# Altium PCB BTL.PcbDoc
Units mm, origin at the board's own origin, x right, y up, seen from the top; angles counter-clockwise.
Board outline 106.17 x 46.48 mm, 2 copper layers (Top Layer, Bottom Layer); 36 components, 67 nets, 172 pads, 38 vias.
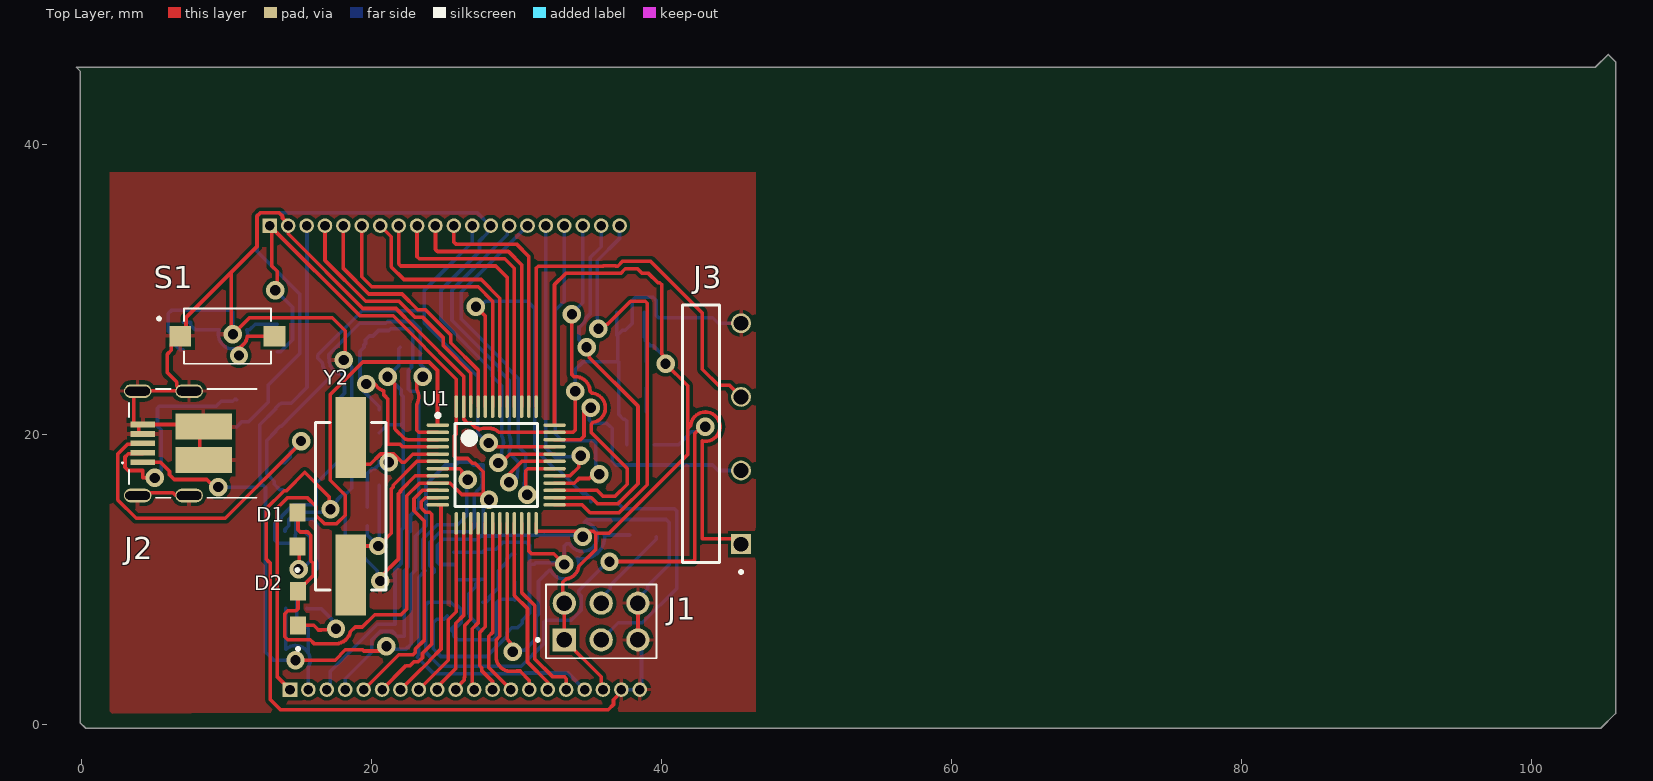
[diagram p0: Top Layer view]
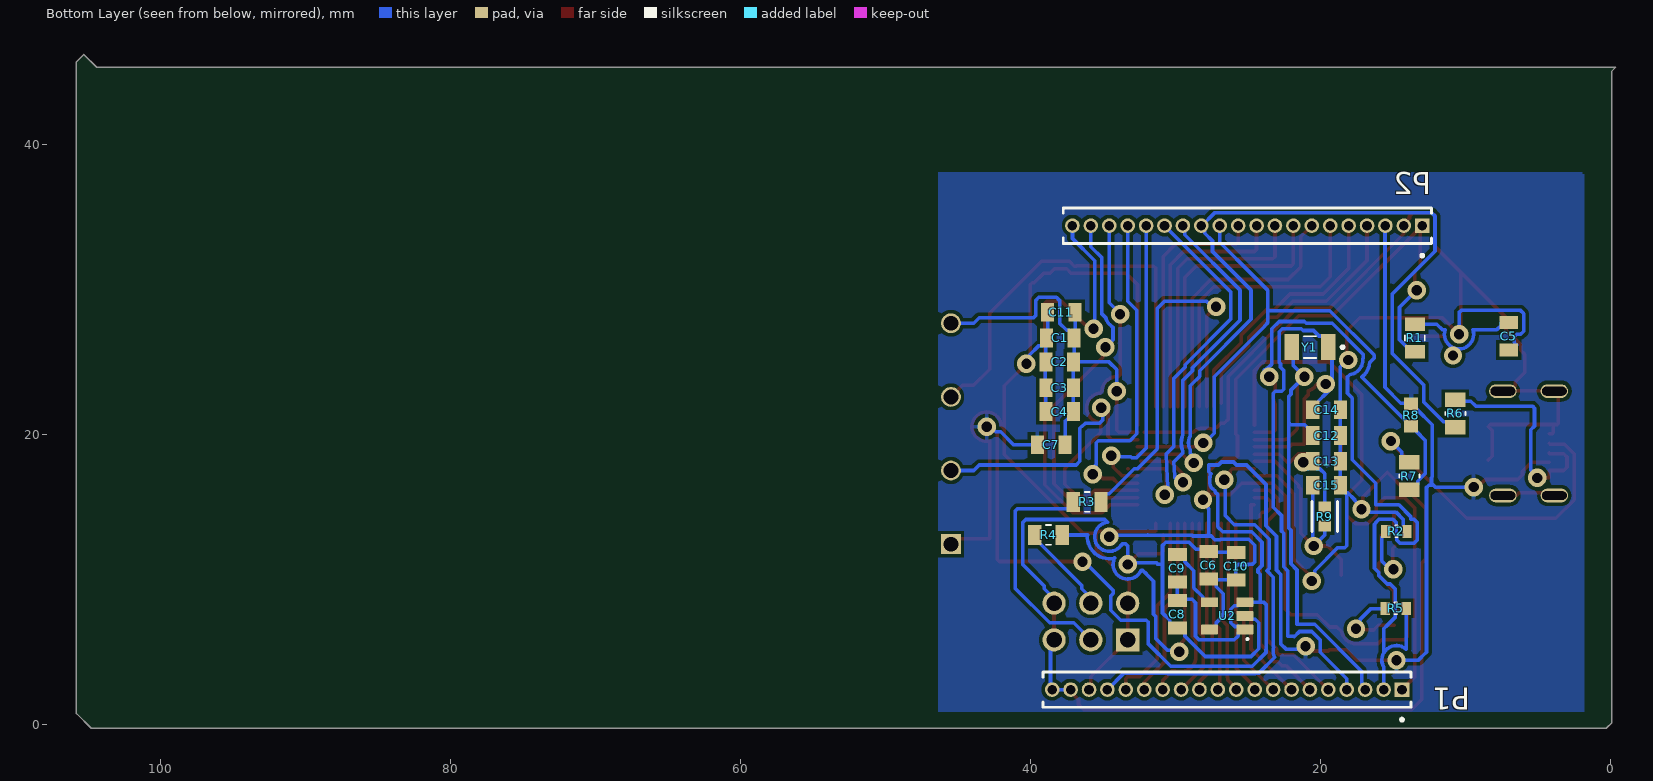
[diagram p1: Bottom Layer view, seen from below]
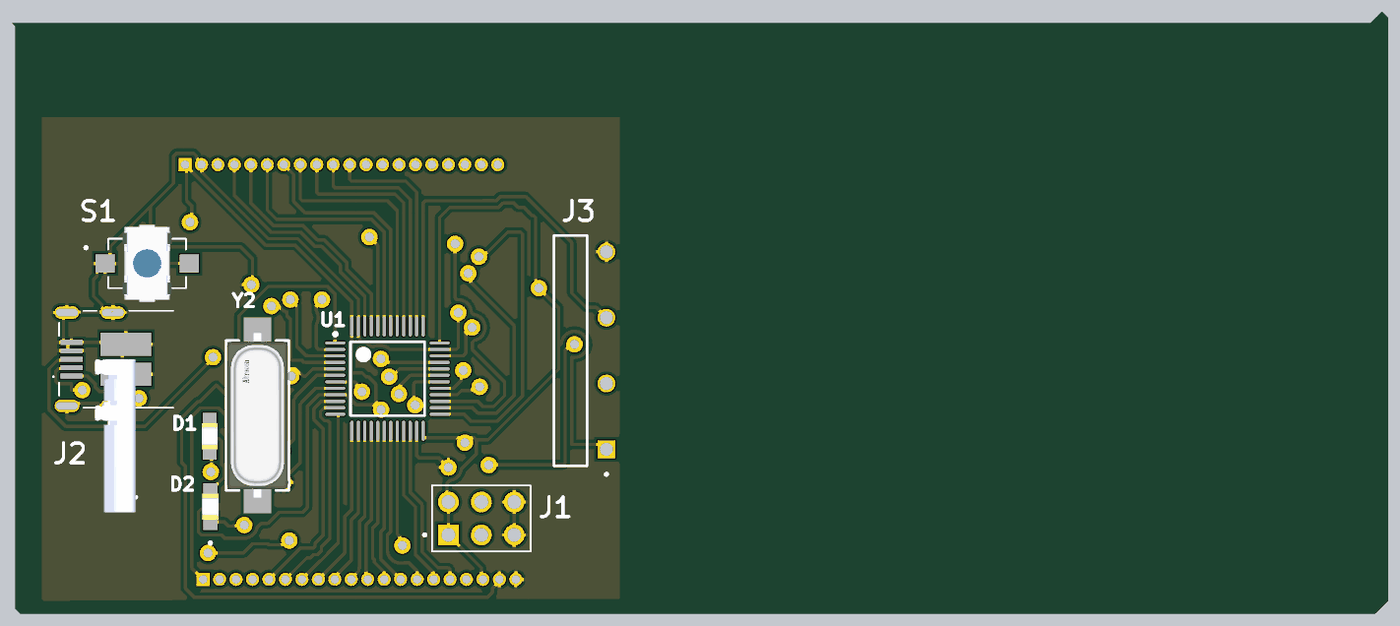
[diagram p2: 3D render of the assembled board from above, using the file's embedded part models]
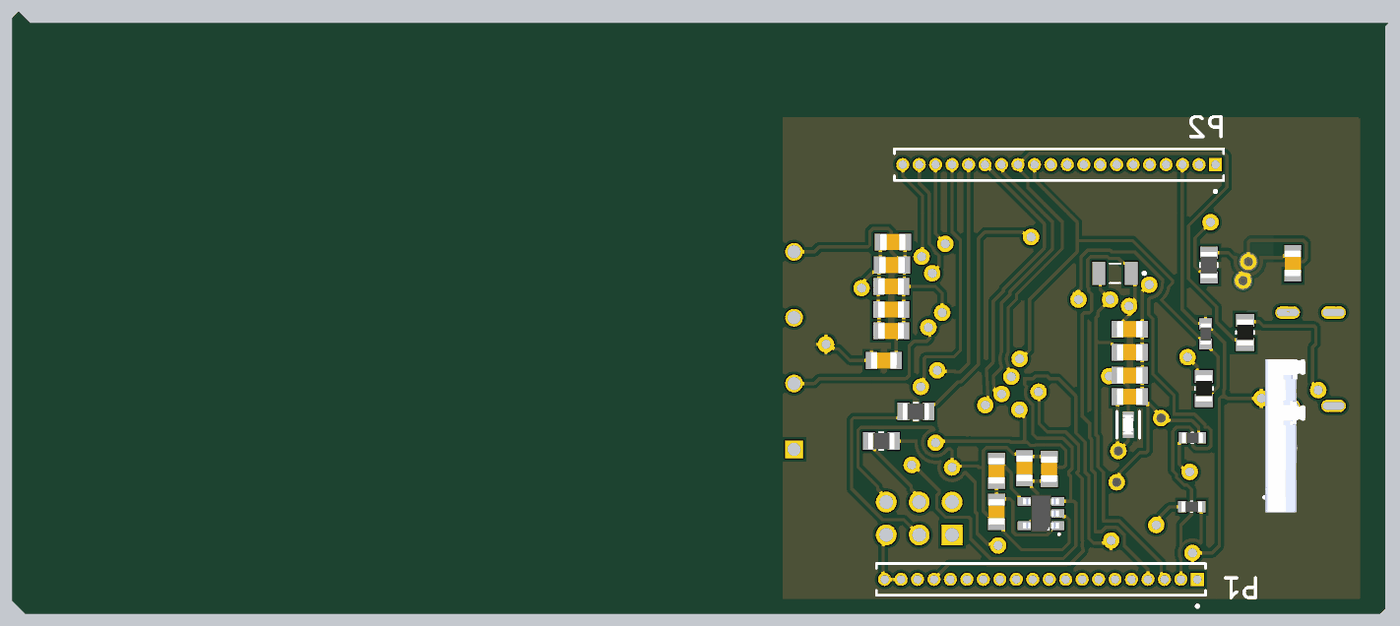
[diagram p3: 3D render of the assembled board from below, using the file's embedded part models]

## Layer stack, top to bottom
Top Solder: solder mask 0.0102, Solder Resist, Dk 3.5
Top Layer: signal copper 0.0356
Dielectric 1: dielectric 0.32, FR-4, Dk 4.8
Bottom Layer: signal copper 0.0356
Bottom Solder: solder mask 0.0102, Solder Resist, Dk 3.5

## Board outline
-0.127,45.085 -0.127,0.127 0.254,-0.254 104.775,-0.254 105.791,0.762 105.791,45.72 105.283,46.228 104.394,45.339 -0.381,45.339

## Design rules (kind name [scope] priority, off if disabled: settings)
Clearance [All] p1: gap=0.25 ignorepadtopadclearanceinfootprint=TRUE
MinimumSolderMaskSliver [All] p1: minsoldermaskwidth=0.045
PolygonConnect [All] p1: connectstyle=Relief reliefconductorwidth=0.254 reliefentries=4 polygonreliefangle="90 Angle" airgapwidth=0.254
RoutingVias [All] p1: holewidth=0.711 width=1.27 viastyle="Through Hole" minholewidth=0.711 minwidth=1.27 maxholewidth=0.711 maxwidth=1.27
SilkToSolderMaskClearance [IsPad] p1: minsilkscreentomaskgap=0 clearancetoexposedcopper=TRUE
SolderMaskExpansion [All] p1: expansion=0.102 istentingtop=FALSE
SupplyNets "Schematic Supply Nets_4" [InNet('5v')] p1: voltage=0.000
SupplyNets "Schematic Supply Nets_2" [InNet('VCC3V3')] p2: voltage=0.000
SupplyNets "Schematic Supply Nets" [InNet('GND')] p3: voltage=0.000
Width [All] p1: maxlimit=0.254 minlimit=0.25 preferedwidth=0.25
28 further rules are at their usual default settings.

## Components (designator, comment, footprint, x,y, rotation, side; value= is the part's Value field where it differs from the comment)
C1 "100nF" WCAP-CSGP_0805_L2W1.25H0.8_Reflow 37.912,26.67 r0 bottom
C2 "100nF" WCAP-CSGP_0805_L2W1.25H0.8_Reflow 37.973,25.019 r0 bottom
C3 "100nF" WCAP-CSGP_0805_L2W1.25H0.8_Reflow 37.973,23.241 r0 bottom
C4 "100nF" WCAP-CSGP_0805_L2W1.25H0.8_Reflow 37.973,21.59 r0 bottom
C5 "1μF" WCAP-CSGP_0805_L2W1.25H1.25 6.985,26.797 r90 bottom
C6 "100nF" WCAP-CSGP_0805_L2W1.25H0.8_Reflow 27.686,10.983 r270 bottom
C7 "1μF" WCAP-CSGP_0805_L2W1.25H1.25 38.542,19.304 r0 bottom
C8 "22nF" WCAP-CSGP_0805_L2W1.25H0.8_Reflow 29.845,7.62 r90 bottom
C9 "100nF" WCAP-CSGP_0805_L2W1.25H0.8_Reflow 29.845,10.795 r270 bottom
C10 "10μF" WCAP-CSGP_0805_L2W1.25H1.25 25.781,10.922 r270 bottom
C11 "22nF" WCAP-CSGP_0805_L2W1.25H0.8_Reflow 37.846,28.448 r0 bottom
C12 "22pF" WCAP-CSGP_0805_L2W1.25H0.6_Reflow 19.558,19.939 r0 bottom
C13 "22pF" WCAP-CSGP_0805_L2W1.25H0.6_Reflow 19.558,18.161 r0 bottom
C14 "22pF" WCAP-CSGP_0805_L2W1.25H0.6_Reflow 19.558,21.717 r0 bottom
C15 "22pF" WCAP-CSGP_0805_L2W1.25H0.6_Reflow 19.558,16.51 r0 bottom
D1 "AP2012MGC" LED_AP2012MGC 14.859,13.462 r90 top
D2 "AP2012MGC" LED_AP2012MGC 14.906,8.02 r90 top
J1 "3x2 header" HARWIN_M20-9980346 35.814,7.112 r0 top
J2 "UJ2-MIBH-4-SMT-TR" CUIDEVICES_UJ2-MIBH-4-SMT-TR 9.141,19.401 r90 top
J3 "SWD" SAMTEC_TSW-204-16-G-S-RA 45.466,12.446 r270 top
P1 "TMS-120-21-S-S" SAMTEC_TMS-120-21-S-S 26.416,2.413 r0 bottom
P2 "TMS-120-21-S-S" SAMTEC_TMS-120-21-S-S 25.019,34.417 r0 bottom
R1 "10K" RESC2012X60N#1 13.462,26.67 r90 bottom
R2 "ERJPA3F5100V" RES_ERJPA3F5100V 14.732,13.335 r180 bottom
R3 "100K" RESC2012X60N#1 36.068,15.367 r0 bottom
R4 "100K" RESC2012X60N#1 38.735,13.081 r180 bottom
R5 "ERJPA3F5100V" RES_ERJPA3F5100V 14.779,8.02 r180 bottom
R6 "20K" RESC2012X60N#2 10.668,21.463 r270 bottom
R7 "20K" RESC2012X60N#2 13.843,17.145 r270 bottom
R8 "CRG0603F4K7" RESC1608X55N 13.716,21.354 r270 bottom
R9 "ERJ-3EKF1004V" FP-ERJ3EK-IPC_C 19.685,14.351 r90 bottom
S1 "SWITCH" SW_TS10-63-26-BE-250-SMT-TR 10.033,26.797 r0 top
U1 "STM32F103C8T6" STM-LQFP48_L 28.575,17.907 r0 top
U2 "RT9193-33GB" SOT94P279X129-5N 26.416,7.493 r0 bottom
Y1 "32.768KHz" XTAL_NX3215SA-32.768K-STD-MUA-14 20.701,26.035 r0 bottom
Y2 "8MHz" FP-ABLS-MFG 18.542,15.062 r90 top

## Footprints (in the part's own frame and the unit in brackets; to place one, negate y for a bottom-side part, rotate by r counter-clockwise, add the part's x,y. Pads: shape width x height; smd on the part's side, far side on the other; paste and mask are expansions set on the pad)
CUIDEVICES_UJ2-MIBH-4-SMT-TR [mm]
  rect 0.4x1.7 smd: 1(-1.3,4.95) 2(-0.65,4.95) 3(0,4.95) 4(0.65,4.95) 5(1.3,4.95)
  rect 1.8x3.9 smd: P5(1.15,0.75) P6(-1.15,0.75)
  oval 0.95x1.9 hole 0.6 slot 1.7 at 90 deg: S1(-3.6,5.3) S2(-3.6,1.75) S3(3.6,5.3) S4(3.6,1.75)
  silkscreen extent -3.75,-2.9 3.75,6.4, body extent -11.8,-0.21 0,3.15, height 1.75
FP-ABLS-MFG [mm]
  rect 5.6x2.1 smd paste+0 mask+0: 1(-4.75,0) 2(4.75,0)
  silkscreen extent -5.77,-2.42 5.77,2.42, body extent -6.35,-2.35 6.35,2.35, height 4.3
FP-ERJ3EK-IPC_C [mm]
  rect 0.757x0.862 smd paste+0 mask+0: 1(-0.651,0) 2(0.651,0)
  silkscreen extent -1.03,-0.87 1.03,0.87, body extent -0.8,-0.4 0.8,0.4, height 0.55
HARWIN_M20-9980346 [mm]
  rect 1.605x1.605 / inner round 1.605 / far side rect 1.605x1.605 hole 1.07: 1(-2.54,-1.27)
  round 1.605 hole 1.07: 2(-2.54,1.27) 3(0,-1.27) 4(0,1.27) 5(2.54,-1.27) 6(2.54,1.27)
  silkscreen extent -4.47,-2.54 3.81,2.54
LED_AP2012MGC [mm]
  rect 1.25x1.1 smd: A(1.175,0) C(-1.175,0)
  silkscreen extent -2.9,-0.1 -2.7,0.1, body extent -1,-0.63 1,0.63, height 1.1
RES_ERJPA3F5100V [mm]
  rect 0.65x0.9 smd: 1(-0.725,0) 2(0.725,0)
  silkscreen extent -0.08,-0.4 0.08,0.4, body extent -0.8,-0.4 0.8,0.4, height 0.45
RESC1608X55N [mm]
  rect 0.87x0.97 smd: 1(-0.78,0) 2(0.78,0)
  body extent -0.8,-0.4 0.8,0.4, height 0.55
RESC2012X60N#1 [mm]
  rect 0.92x1.38 smd: 1(-0.955,0) 2(0.955,0)
  silkscreen extent -0.17,-0.68 0.17,0.68, body extent -1,-0.63 1,0.63, height 0.6
RESC2012X60N#2 [mm]
  rect 1x1.42 smd: 1(-0.935,0) 2(0.935,0)
  silkscreen extent -0.12,-0.7 0.12,0.7, body extent -1,-0.63 1,0.63, height 0.6
SAMTEC_TMS-120-21-S-S [mm]
  rect 1.01x1.01 hole 0.66: 01(-12.065,0)
  round 1.01 hole 0.66: 02(-10.795,0) 03(-9.525,0) 04(-8.255,0) 05(-6.985,0) 06(-5.715,0) 07(-4.445,0) 08(-3.175,0) 09(-1.905,0) 10(-0.635,0) 11(0.635,0) 12(1.905,0) 13(3.175,0) 14(4.445,0) 15(5.715,0) 16(6.985,0) 17(8.255,0) 18(9.525,0) 19(10.795,0) 20(12.065,0)
  silkscreen extent -12.7,-1.22 12.7,2.17
SAMTEC_TSW-204-16-G-S-RA [mm]
  rect 1.37x1.37 / inner round 1.37 / far side rect 1.37x1.37 hole 1.02: 01(0,0)
  round 1.37 hole 1.02: 02(-5.08,0) 03(-10.16,0) 04(-15.24,0)
  silkscreen extent -16.51,-4.04 2.02,0.1
SOT94P279X129-5N [mm]
  rrect12% 1.17x0.67 smd: 1(-1.22,0.94) 2(-1.22,0) 3(-1.22,-0.94) 4(1.22,-0.94) 5(1.22,0.94)
  silkscreen extent -1.47,1.53 -1.33,1.67, body extent -1.4,-1.45 1.4,1.45, height 1.3
STM-LQFP48_L [mm] "QFP, 48-Leads, Body 7x7mm, Pitch 0.5mm, IPC High Density"
  oval 1.55x0.25 smd: 1(-4.025,2.75) 2(-4.025,2.25) 3(-4.025,1.75) 4(-4.025,1.25) 5(-4.025,0.75) 6(-4.025,0.25) 7(-4.025,-0.25) 8(-4.025,-0.75) 9(-4.025,-1.25) 10(-4.025,-1.75) 11(-4.025,-2.25) 12(-4.025,-2.75) 25(4.025,-2.75) 26(4.025,-2.25) 27(4.025,-1.75) 28(4.025,-1.25) 29(4.025,-0.75) 30(4.025,-0.25) 31(4.025,0.25) 32(4.025,0.75) 33(4.025,1.25) 34(4.025,1.75) 35(4.025,2.25) 36(4.025,2.75)
  oval 0.25x1.55 smd: 13(-2.75,-4.025) 14(-2.25,-4.025) 15(-1.75,-4.025) 16(-1.25,-4.025) 17(-0.75,-4.025) 18(-0.25,-4.025) 19(0.25,-4.025) 20(0.75,-4.025) 21(1.25,-4.025) 22(1.75,-4.025) 23(2.25,-4.025) 24(2.75,-4.025) 37(2.75,4.025) 38(2.25,4.025) 39(1.75,4.025) 40(1.25,4.025) 41(0.75,4.025) 42(0.25,4.025) 43(-0.25,4.025) 44(-0.75,4.025) 45(-1.25,4.025) 46(-1.75,4.025) 47(-2.25,4.025) 48(-2.75,4.025)
  silkscreen extent -4.15,-2.85 2.85,3.55, body extent -3.5,-3.5 3.5,3.5, height 1.6
SW_TS10-63-26-BE-250-SMT-TR [mm]
  rect 1.5x1.4 smd: 1(-3.25,0) 2(3.25,0)
  silkscreen extent -4.82,-1.9 3,1.9, body extent -1.9,-3.7 1.9,3.7, height 2.2
WCAP-CSGP_0805_L2W1.25H0.6_Reflow [mm] "Ceramic Capacitors, body 2x1.25mm"
  rect 0.9x1.3 smd: 1(-0.95,0) 2(0.95,0)
  body extent -1,-0.63 1,0.63, height 0.6
WCAP-CSGP_0805_L2W1.25H0.8_Reflow [mm] "Ceramic Capacitors, body 2x1.25mm"
  rect 0.9x1.3 smd: 1(-0.95,0) 2(0.95,0)
  body extent -1,-0.62 1,0.63, height 0.8
WCAP-CSGP_0805_L2W1.25H1.25 [mm] "Ceramic Capacitors, body 2x1.25mm"
  rect 0.9x1.3 smd: 1(-0.95,0) 2(0.95,0)
  body extent -1,-0.63 1,0.63, height 1.25
XTAL_NX3215SA-32.768K-STD-MUA-14 [mm]
  rect 1x1.8 smd: 1(-1.25,0) 2(1.25,0)
  silkscreen extent -2.35,-0.75 0.43,0.75

## Part data
C1 C2 C3 C4 C6 C9: library part 885012207072, "WCAP-CSGP Multilayer Ceramic Chip Capacitor, General Purpose, size 0805, X7R, 100nF, 25V", Capacitance Tolerance=+/-10%, Case/Size Code=0805, Insulation Resistance=5GΩ, Manufacturer="Wurth Elektronik", Max Operating Temperature=125°C, Min Operating Temperature=-55°C, Rated Voltage (DC)=25V, Capacitance=100nF, Category="Multilayer Ceramic Chip Capacitors", Ceramic Type=X7R, ComponentLink1Description="Website Link", ComponentLink1URL=https://www.we-online.com/redexpert/article/885012207072?ad, ComponentLink2Description="Datasheet Link", ComponentLink2URL=https://www.we-online.com/redexpert/spec/885012207072?ad, Dissipation Factor=3.5%, Height=0.8mm, Length=2mm, Manufacturer Part Number=885012207072, Match Code=WCAP-CSGP, Mount="Surface Mount", Packaging="Tape and Reel", Technical Reference=X7R0805104K025DFCT10000, Width=1.25mm
C5 C7: library part 885012107015, "WCAP-CSGP Multilayer Ceramic Chip Capacitor, General Purpose, size 0805, X5R, 1μF, 25V", Capacitance Tolerance=+/-20%, Case/Size Code=0805, Insulation Resistance=0.5GΩ, Manufacturer="Wurth Elektronik", Max Operating Temperature=85°C, Min Operating Temperature=-55°C, Rated Voltage (DC)=25V, Capacitance=1μF, Category="Multilayer Ceramic Chip Capacitors", Ceramic Type=X5R, ComponentLink1Description="Website Link", ComponentLink1URL=https://www.we-online.com/redexpert/article/885012107015?ad, ComponentLink2Description="Datasheet Link", ComponentLink2URL=https://www.we-online.com/redexpert/spec/885012107015?ad, Dissipation Factor=5%, Height=1.25mm, Length=2mm, Manufacturer Part Number=885012107015, Match Code=WCAP-CSGP, Mount="Surface Mount", Packaging="Tape and Reel", Technical Reference=X5R0805105M025DFCT10000, Width=1.25mm
C8 C11: library part 885012207068, "WCAP-CSGP Multilayer Ceramic Chip Capacitor, General Purpose, size 0805, X7R, 22nF, 25V", Capacitance Tolerance=+/-10%, Case/Size Code=0805, Insulation Resistance=10GΩ, Manufacturer="Wurth Elektronik", Max Operating Temperature=125°C, Min Operating Temperature=-55°C, Rated Voltage (DC)=25V, Capacitance=22nF, Category="Multilayer Ceramic Chip Capacitors", Ceramic Type=X7R, ComponentLink1Description="Website Link", ComponentLink1URL=https://www.we-online.com/redexpert/article/885012207068?ad, ComponentLink2Description="Datasheet Link", ComponentLink2URL=https://www.we-online.com/redexpert/spec/885012207068?ad, Dissipation Factor=3.5%, Height=0.8mm, Length=2mm, Manufacturer Part Number=885012207068, Match Code=WCAP-CSGP, Mount="Surface Mount", Packaging="Tape and Reel", Technical Reference=X7R0805223K025DFCT10000, Width=1.25mm
C10: library part 885012107027, "WCAP-CSGP Multilayer Ceramic Chip Capacitor, General Purpose, size 0805, X5R Class II, 10μF, 25V", Capacitance Tolerance=+/-10%, Case/Size Code=0805, Insulation Resistance=0.005GΩ, Manufacturer="Wurth Elektronik", Max Operating Temperature=85°C, Min Operating Temperature=-55°C, Rated Voltage (DC)=25V, Capacitance=10μF, Category="Multilayer Ceramic Chip Capacitors", Ceramic Type="X5R Class II", ComponentLink1Description="Website Link", ComponentLink1URL=https://www.we-online.com/redexpert/article/885012107027?ad, ComponentLink2Description="Datasheet Link", ComponentLink2URL=https://www.we-online.com/redexpert/spec/885012107027?ad, Dissipation Factor=12.5%, Height=1.25mm, Length=2mm, Manufacturer Part Number=885012107027, Match Code=WCAP-CSGP, Mount="Surface Mount", Packaging="Tape and Reel", Technical Reference=X5R0805106K025DFCT10000, Width=1.25mm
C12 C13 C14 C15: library part 885012007030, "WCAP-CSGP Multilayer Ceramic Chip Capacitor, General Purpose, size 0805, NP0, 22pF, 25V", Capacitance Tolerance=+/-5%, Case/Size Code=0805, Insulation Resistance=10GΩ, Manufacturer="Wurth Elektronik", Max Operating Temperature=125°C, Min Operating Temperature=-55°C, Rated Voltage (DC)=25V, Capacitance=22pF, Category="Multilayer Ceramic Chip Capacitors", Ceramic Type=NP0, ComponentLink1Description="Website Link", ComponentLink1URL=https://www.we-online.com/redexpert/article/885012007030?ad, ComponentLink2Description="Datasheet Link", ComponentLink2URL=https://www.we-online.com/redexpert/spec/885012007030?ad, Height=0.6mm, Length=2mm, Manufacturer Part Number=885012007030, Match Code=WCAP-CSGP, Mount="Surface Mount", Packaging="Tape and Reel", Q Factor=840, Technical Reference=NP00805220J025DFCT10000, Width=1.25mm
D1 D2: "Green 2 x 1.25 x 1.1 mm 120Â° Water Clear 70 mcd 2.1 V Chip LED Lamp SMT", Package="0805 Kingbright", Check_prices=https://www.snapeda.com/parts/AP2012MGC/Kingbright/view-part/?ref=eda, MF=Kingbright, MP=AP2012MGC, SnapEDA_Link=https://www.snapeda.com/parts/AP2012MGC/Kingbright/view-part/?ref=snap
J1: library part M20-9980346, Package=None, Availability=Unavailable, MP=M20-9980346, Price=None
J2: "Micro B, USB 2.0, 480 Mbps, 30 Vac, 1.8 A, Right Angle, Surface Mount, USB Receptacle", Package=None, Check_prices=https://www.snapeda.com/parts/UJ2-MIBH-4-SMT-TR/Same+Sky/view-part/?ref=eda, MF="Same Sky", MP=UJ2-MIBH-4-SMT-TR, SnapEDA_Link=https://www.snapeda.com/parts/UJ2-MIBH-4-SMT-TR/Same+Sky/view-part/?ref=snap
J3: library part TSW-204-16-G-S-RA, "Connector Header Through Hole, Right Angle 4 position 0.200 (5.08mm)", Package=None, Check_prices=https://www.snapeda.com/parts/TSW-204-16-G-S-RA/Samtec/view-part/?ref=eda, MF=Samtec, MP=TSW-204-16-G-S-RA, SnapEDA_Link=https://www.snapeda.com/parts/TSW-204-16-G-S-RA/Samtec/view-part/?ref=snap
P1 P2: Package=None, Availability=Unavailable, MP=TMS-120-21-S-S, Price=None
R1: library part RC0805FR-0710KL, "10 kOhms Â±1% 0.125W, 1/8W Chip Resistor 0805 (2012 Metric) Moisture Resistant Thick Film", Package="2012 Rohm Semiconductor", Availability="In Stock", Check_prices=https://www.snapeda.com/parts/RC0805FR-0710KL/Yageo/view-part/?ref=eda, MF=Yageo, MP=RC0805FR-0710KL, Price=None, Purchase-URL=https://pricing.snapeda.com/search/part/RC0805FR-0710KL/?ref=eda, SnapEDA_Link=https://www.snapeda.com/parts/RC0805FR-0710KL/Yageo/view-part/?ref=snap
R2 R5: "RES, THICK FILM, 510R, 1%, 0.25W, 0603", Package="1608-2 Panasonic", Check_prices=https://www.snapeda.com/parts/ERJ-PA3F5100V/Panasonic/view-part/?ref=eda, MF=Panasonic, MP=ERJ-PA3F5100V, SnapEDA_Link=https://www.snapeda.com/parts/ERJ-PA3F5100V/Panasonic/view-part/?ref=snap
R3 R4: library part RC0805FR-07100KL, "100 kOhms Â±1% 0.125W, 1/8W Chip Resistor 0805 (2012 Metric) Moisture Resistant Thick Film", Package="2012 Yageo", Check_prices=https://www.snapeda.com/parts/RC0805FR-07100KL/Yageo/view-part/?ref=eda, MF=Yageo, MP=RC0805FR-07100KL, SnapEDA_Link=https://www.snapeda.com/parts/RC0805FR-07100KL/Yageo/view-part/?ref=snap
R6 R7: library part CR0805-FX-2002ELF, "Res 0805 20k 1% 125mW", Package="0805 Bourns", Check_prices=https://www.snapeda.com/parts/CR0805-FX-2002ELF/Bourns/view-part/?ref=eda, MF=Bourns, MP=CR0805-FX-2002ELF, SnapEDA_Link=https://www.snapeda.com/parts/CR0805-FX-2002ELF/Bourns/view-part/?ref=snap
R8: "Resistor, Thick Film, Res 4.7 Kilohms, Pwr-Rtg 0.1 W, Tol 1%, SMT, 0603", Package=0603, Power_Rating=".1 W", Resistance=4.7K, Tolerance=1%, Voltage_Rating="50 V", Check_prices=https://www.snapeda.com/parts/CRG0603F4K7/TE+Connectivity+Passive+Product/view-part/?ref=eda, EU_RoHS_Compliance="Compliant with Exemptions", MF="TE Connectivity", MP=CRG0603F4K7, SnapEDA_Link=https://www.snapeda.com/parts/CRG0603F4K7/TE+Connectivity+Passive+Product/view-part/?ref=snap
R9: library part CMP-1012-00849-3, "RES SMD 1M OHM 1% 1/10W 0603", Case Code (Imperial)=0603, Case Code (Metric)=1608, Max Operating Temperature=155°C, Max Power Dissipation=100mW, Min Operating Temperature=-55°C, Package Quantity=1, Resistance=1MR, Resistance Tolerance=1%, Resistor Type="Thick Film", Temperature Coefficient=100ppm/°C, Voltage Rating=75V, Case/Package=0603, Construction=Rectangular, Contact Plating=Tin, Depth=0.8mm, Features="Automotive AEC-Q200", Height=0.022inch, Lead Free="Lead Free", Length=1.6mm, Military Standard=Not, Mount="Surface Mount", Number of Pins=2, Number of Terminations=2, Packaging="Tape and Reel", Power Rating=100mW, Radiation Hardening=No, REACH SVHC="No SVHC", RoHS Compliant=Yes, Series=ERJ, Size Code=0603, Termination=SMD/SMT, Tolerance=1%, Voltage Rating (DC)=75V, Width=0.8mm
S1: library part TS10-63-26-BE-250-SMT-TR, "6.1 x 3.8 mm, 2.6 mm Actuator Height, 250 gf, Surface Mount, SPST, Tactile Switch", Package=None, Check_prices=https://www.snapeda.com/parts/TS10-63-26-BE-250-SMT-TR/Same+Sky/view-part/?ref=eda, MF="Same Sky", MP=TS10-63-26-BE-250-SMT-TR, SnapEDA_Link=https://www.snapeda.com/parts/TS10-63-26-BE-250-SMT-TR/Same+Sky/view-part/?ref=snap
U1: library part CMP-0237-00215-3, "ARM Cortex-M3 32-bit MCU, 64 KB Flash, 20 KB Internal RAM, 37 I/Os, 48-pin LQFP, -40 to 85 degC, Tray", I/Os (High Current)=37, Operating Frequency(F) (Processor speed) (MHz)=72, Supply Voltage(Vcc) min (V)=2, A/D Converter="2x12-bit (10 Channel)", ComponentLink1Description="Manufacturer URL", ComponentLink1URL=http://www.st.com/web/en/home.html, ComponentLink2Description=Datasheet, ComponentLink2URL=http://www.st.com/st-web-ui/static/active/en/resource/technical/document/datasheet/CD00161566.pdf, ComponentLink3Description="Package Specification", ComponentLink3URL=http://www.st.com/st-web-ui/static/active/en/resource/technical/document/datasheet/DM00058181.pdf, Core="ARM Cortex-M3", DatasheetVersion="Rev. 16", FLASH Size (Prog) (kB)=64, Internal RAM Size (kB)=20, Mounting Technology="Surface Mount", PackageDescription="48-Pin Low Profile Quad Flat Package, 7 x 7 mm Body, 0.5 mm Pitch", PackageReference=LQFP48, PackageVersion="Rev. 6, 06/2013", Packing=Tray, PartNumber=STM32F103C8T6
U2: "Linear Voltage Regulator IC Positive Fixed 1 Output 300mA TSOT-23-5", Package="SOT-23-5 Richtek", Check_prices=https://www.snapeda.com/parts/RT9193-33GB/Richtek+USA+Inc./view-part/?ref=eda, Digi-Key_Part_Number=1028-1014-2-ND, MF="Richtek USA", MP=RT9193-33GB, Purchase-URL=https://pricing.snapeda.com/search/part/RT9193-33GB/?ref=eda, SnapEDA_Link=https://www.snapeda.com/parts/RT9193-33GB/Richtek+USA+Inc./view-part/?ref=snap
Y1: library part NX3215SA-32.768K-STD-MUA-14, "32.768kHz Â±20ppm Crystal 6pF 70 kOhms 2-SMD, No Lead  MANUFACTURER: NIHON DEMPA KOGYO", Package=None, Availability=Unavailable, MP=NX3215SA-32.768K-STD-MUA-14, Price=None
Y2: library part CMP-27762-009874-1, "CRYSTAL 8.0000MHZ 18PF SMD", Case/Package=SMD/SMT, ESR (Equivalent Series Resistance)=80R, Frequency Stability=50ppm, Frequency Tolerance=20ppm, Load Capacitance=18pF, Max Operating Temperature=70°C, Min Operating Temperature=-20°C, Operating Frequency="8 MHz", Package Quantity=1000, Accuracy=20ppm, Contact Plating=Tin, Depth=4.7mm, Frequency=8MHz, Height=0.165inch, Lead Free="Lead Free", Length=11.4mm, Mount="Surface Mount", Number of Pins=2, Packaging="Tape and Reel", Radiation Hardening=No, REACH SVHC="No SVHC", Series=ABLS, Series Resistance=80R, Termination=SMD/SMT, Tolerance=20ppm, Width=4.7mm

## Via types
v1: diameter 1.27, hole 0.711, Top Layer to Bottom Layer, 38 vias

## Nets (pads, with @x,y where several pads share a name; then routed paths per layer and width w, separated by ;. In a path a pad name is that pad's centre, name@x,y a point inside that pad or via, vN(x,y) a via of type N, cw(c..) or ccw(c..) an arc to the next point about the centre after c; other vN are vias at no path point)
5v: C7.2 C8.2 C9.2 J2.1 P2.03 R8.1 U2.1 U2.3 | length 134.5
  Top Layer w0.25: J2.1 5.416,18.101 6.034,17.483 6.034,17.227 6.359,16.903 8.602,16.903 9.122,16.383 v1(9.398,16.383) ; v1(14.732,4.445) 17.462,4.445 18.17,5.153 19.358,5.153 19.431,5.08 21.082,5.08 21.209,5.207 v1(21.003,5.413) ; v1(36.391,11.239) 36.391,11.254 42.137,11.254 42.283,11.4 42.283,20.105 42.729,20.551 v1(43.005,20.551)
  Bottom Layer w0.25: v1(9.398,16.383) 12.053,16.383 12.173,16.503 12.514,16.503 12.661,16.357 12.661,4.994 12.734,4.921 12.807,4.847 13.137,4.518 13.21,4.445 v1(14.732,4.445) ; 12.173,16.51 12.319,16.656 12.319,17.027 12.258,17.088 12.258,20.676 13.356,21.774 13.356,21.824 13.666,22.134 R8.1 13.759,22.177 14.43,22.177 15.527,23.274 15.527,34.384 P2.03 ; v1(21.003,5.413) 21.209,5.207 22.352,5.207 22.725,5.58 22.725,10.38 23.011,10.666 23.011,12.998 23.735,13.722 23.735,16.567 25.075,17.907 25.764,17.907 25.971,18.113 26.807,18.113 27.014,17.907 27.686,17.907 27.686,17.449 27.529,17.292 cw(c26.603,16.889) 27.612,16.944 cw(c26.612,16.798) 27.519,16.354 ccw(c28.075,15.511) 27.377,16.24 cw(c26.603,16.889) 27.301,16.16 ccw(c28.075,15.511) 27.168,15.955 cw(c26.612,16.798) 27.051,15.888 27.051,13.635 26.709,13.294 24.721,13.294 24.011,12.584 24.011,10.969 24.283,10.696 24.283,10.524 24.13,10.371 24.13,8.433 ; U2.1@25.524,6.474 25.656,6.343 25.656,6.115 25.928,5.843 28.353,5.843 28.596,6.086 28.596,8.403 28.829,8.636 29.779,8.636 C8.2 C9.2 ; U2.1@25.527,6.477 25.527,6.634 25.656,6.763 25.893,6.763 26.156,7.026 26.156,7.96 25.913,8.203 25.676,8.203 25.446,8.433 U2.3 24.13,8.433 ; v1(36.391,11.239) 36.386,11.239 36.322,11.303 34.274,9.255 34.274,9.048 34.452,8.87 34.452,7.894 33.762,7.204 31.993,7.204 31.842,7.054 31.842,5.553 30.306,4.017 24.685,4.017 23.735,4.967 23.735,5.071 ccw(c22.225,5.08) 23.725,5.254 23.725,8.287 23.798,8.36 23.871,8.433 24.13,8.433 ; C7.2 41.148,19.304 42.037,20.193 42.371,20.193 42.729,20.551 v1(43.005,20.551)
BOOT0: R3.1 U1.44 | length 26.8
  Top Layer w0.25: v1(27.178,28.829) 27.825,28.182 U1.44
  Bottom Layer w0.25: v1(27.178,28.829) 27.453,28.829 27.834,29.21 30.734,29.21 31.242,28.702 31.242,19.015 32.6,17.657 32.823,17.657 34.548,15.932 34.778,15.932 35.113,15.597 R3.1
GND: C1.1 C2.1 C3.1 C4.1 C5.1 C6.1 C7.1 C8.1 C10.1 C11.1 C12.1 C13.1 C14.1 C15.1 J1.5 J1.6 J2.4 J2.5 J2.P5 J2.P6 J2.S1 J2.S2 J2.S3 J2.S4 J3.04 P1.19 P1.20 P2.02 R2.2 S1.1 U1.8 U1.23 U1.35 U1.47 U2.2 | length 248.1
  Top Layer w0.25: J2.S1 3.841,15.994 6.273,15.994 6.429,15.838 7.354,15.838 J2.S2 ; J2.5@3.928,20.701 3.653,20.701 3.578,20.776 3.578,22.738 3.878,23.038 J2.S4@6.826,23.038 ; J2.4 4.003,20.051 3.928,20.126 3.928,20.626 4.003,20.701 J2.5 8.241,20.701 J2.P5 8.128,20.288 8.128,18.514 J2.P6 ; J2.S4 6.9,23.001 6.539,23.361 6.539,23.627 5.894,24.272 5.894,25.557 6.158,25.821 6.158,26.222 6.733,26.797 S1.1 7.174,27.188 7.174,28.077 10.287,31.19 ; v1(17.145,14.859) 17.062,14.942 17.062,15.704 15.367,17.399 14.105,16.137 13.947,16.137 12.7,14.89 12.7,11.43 12.908,11.222 12.981,11.149 12.981,1.735 13.691,1.025 36.306,1.025 36.667,1.386 36.667,1.713 37.211,2.257 P1.19 ; v1(18.066,25.152) 18.066,25.654 18.161,25.749 18.161,27.159 17.326,27.994 17.253,28.067 11.557,28.067 v1(10.414,26.924) 10.287,27.051 10.287,31.19 ; v1(20.574,9.906) 20.574,10.16 21.836,11.422 21.836,15.921 21.971,16.056 21.971,16.129 22.999,17.157 U1.8 ; 30.825,13.081 30.825,11.974 30.94,11.859 31.013,11.786 32.537,11.786 v1(33.274,11.049) ; U1.35@32.131,20.157 28.769,20.157 ccw(c28.067,19.431) 27.94,20.433 ccw(c27.813,19.431) 27.413,20.358 ccw(c26.797,19.558) 27.319,20.423 ccw(c26.797,19.558) 27.105,20.52 26.843,20.782 26.618,20.782 26.325,21.075 26.325,21.786 U1.47 26.325,23.967 26.325,24.039 22.96,27.404 22.96,27.41 21.667,28.702 19.376,28.702 14.224,33.854 P2.02 14.224,34.553 13.834,34.943 13.834,35.077 13.614,35.297 12.294,35.297 12.074,35.077 12.074,32.977 10.287,31.19 ; U1.35 33.873,20.157 34.036,20.32 v1(34.036,22.987) ; J1.5 J1.6
  Bottom Layer w0.25: C5.1@6.447,26.185 6.785,25.847 C5.1 ; C5.1@6.46,26.198 6.606,26.344 6.606,26.759 6.443,26.922 6.18,26.922 5.96,27.142 5.96,28.352 6.18,28.572 10.268,28.572 10.414,28.426 v1(10.414,26.924) ; R2.2 14.007,13.46 14.257,13.71 14.257,14.147 14.77,14.66 16.758,14.66 v1@17.114,15.017 ; v1(17.145,14.859) 17.145,14.986 17.653,15.494 ; 17.622,15.525 18.083,15.985 ; v1(18.066,25.152) 18.449,25.152 18.449,24.853 18.608,24.694 C14.1 C12.1 C13.1 C15.1 18.608,16.31 18.161,15.863 18.161,12.338 18.307,12.192 18.796,12.192 20.379,10.609 20.379,10.101 v1(20.574,9.906) ; U2.2 24.986,7.283 24.682,7.283 24.662,7.263 24.479,7.263 24.236,7.02 24.236,5.228 24.765,4.699 27.916,4.699 29.32,6.103 29.32,6.345 29.645,6.67 C8.1 30.045,6.67 30.37,6.995 30.37,7.195 30.87,7.695 30.87,11.049 ; C10.1@25.662,11.898 27.651,11.898 C6.1 27.848,12.095 28.565,12.095 29.04,12.57 30.65,12.57 30.87,12.35 30.87,11.049 ; v1(34.036,22.987) 34.036,24.489 34.566,25.019 C2.1 ; C1.1@36.896,26.87 C11.1 ; P1.19 P1.20 38.599,2.531 38.599,5.597 J1.5 ; C7.1 37.592,20.919 37.446,21.065 37.348,21.065 37.023,21.39 C4.1 C3.1 C2.1 ; J1.6 38.354,8.713 39.021,9.38 39.021,9.557 40.525,11.061 40.525,13.926 40.305,14.146 34.847,14.146 34.658,13.957 cw(c34.544,12.954) 33.726,12.361 cw(c34.544,12.954) 33.716,12.376 33.701,12.391 33.628,12.464 33.524,12.464 33.42,12.464 33.347,12.391 33.274,12.318 v1(33.274,11.049) 33.168,11.155 31.286,11.155 31.18,11.049 30.87,11.049 ; J3.04 43.9,27.686 43.519,28.067 39.767,28.067 39.621,28.213 39.621,29.253 39.401,29.473 38.191,29.473 37.971,29.253 37.971,27.679 37.487,27.195 37.287,27.195 36.962,26.87 C1.1 36.962,25.08 C2.1
NetC5_2: C5.2 R1.2 S1.2 | length 13
  Top Layer w0.25: v1(10.832,25.462) 10.668,25.626 10.668,25.946 ccw(c10.414,26.924) 11.414,26.781 11.43,26.797 S1.2
  Bottom Layer w0.25: C5.2 7.51,27.747 7.51,27.541 7.803,27.248 9.457,27.248 ccw(c10.414,26.924) 11.371,27.248 11.573,27.248 11.95,27.625 R1.2 ; v1@10.668,25.946 10.668,25.626 v1(10.832,25.462)
NetC9_1: C9.1 U2.4 | length 4.5
  Bottom Layer w0.25: U2.4 27.886,8.433 28.096,8.643 28.096,8.813 28.711,9.428 28.711,10.611 29.32,11.22 29.32,11.42 29.645,11.745 C9.1
NetC16_1: 
NetC16_2: 
NetC17_2: 
NetC20_1: 
NetC20_2: 
NetC23_1: 
NetC24_1: 
NetD1_C: D1.C R2.1 | length 4.9
  Top Layer w0.25: D1.C 14.983,12.163 14.983,10.729 14.959,10.705 v1(14.942,10.705)
  Bottom Layer w0.25: v1(14.942,10.705) 14.959,10.705 15.162,10.705 15.748,11.291 15.748,12.919 15.457,13.21 R2.1
NetD2_C: D2.C R5.1 | length 5.6
  Top Layer w0.25: D2.C 15.993,6.845 16.237,6.601 16.31,6.528 16.517,6.528 v1(17.526,6.604)
  Bottom Layer w0.25: R5.1 15.523,8.001 16.491,8.001 17.243,7.249 17.243,7.163 17.526,6.88 v1(17.526,6.604)
NetJ1_3: J1.3 R3.2 | length 16.4
  Bottom Layer w0.25: J1.3 36.992,7.02 38.657,7.02 41.025,9.388 41.025,14.738 40.879,14.884 37.358,14.884 37.023,15.219 R3.2
NetJ1_4: J1.4 R4.1 | length 6.2
  Bottom Layer w0.25: J1.4 35.814,8.749 36.439,9.373 36.439,9.6 39.624,12.785 R4.1@39.624,12.954
NetJ2_2: J2.2 R6.1 | length 15.6
  Top Layer w0.25: J2.2 4.183,18.743 4.183,18.676 3.186,18.676 2.966,18.456 2.966,17.746 3.186,17.526 4.183,17.526 4.183,17.016 v1(5.024,17.016)
  Bottom Layer w0.25: v1(5.024,17.016) 4.978,17.062 5.461,17.545 5.461,20.339 5.207,20.593 5.207,21.825 5.353,21.971 9.271,21.971 9.602,22.302 10.399,22.302 10.541,22.444 10.622,22.444 R6.1
NetJ2_3: J2.3 R7.1 | length 22.7
  Top Layer w0.25: J2.3 4.116,19.326 3.129,19.326 2.466,18.663 2.466,15.499 3.741,14.224 9.887,14.224 15.113,19.45 v1(15.113,19.558)
  Bottom Layer w0.25: R7.1 13.984,18.08 14.359,18.455 14.359,18.804 v1(15.113,19.558)
NetJ4_IRQ: 
NetJ4_MISO: 
NetJ4_MOSI: 
NetJ4_RST: 
NetJ4_SCK: 
NetL1_1: 
NetL2_1: 
NetL2_2: 
NetL3_2: 
OSCIN: C13.2 R9.2 U1.5 Y2.2 | length 13.5
  Top Layer w0.25: Y2.2 18.542,19.086 18.542,18.877 19.467,17.952 19.883,17.952 20.6,18.669 v1@21.154,18.669 ; v1(21.154,18.098) v1@21.154,18.669 ; U1.5 22.817,18.657 22.258,18.098 22.081,18.098 21.51,18.669 v1@21.154,18.669
  Bottom Layer w0.25: R9.2 19.685,15.703 19.683,15.705 19.683,17.315 20.004,17.636 20.183,17.636 C13.2@20.508,17.961 ; C13.2 C13.2@20.508,17.961 ; v1(21.154,18.098) 21.154,17.73 21.06,17.636 20.833,17.636 C13.2@20.508,17.961
OSCOUT: C15.2 R9.1 U1.6 Y2.1 | length 17.7
  Top Layer w0.25: Y2.1 18.542,11.394 19.467,12.319 v1(20.447,12.319) 21.336,13.208 21.336,16.256 21.463,16.383 21.463,16.51 23.11,18.157 U1.6
  Bottom Layer w0.25: R9.1 19.685,13.081 v1(20.447,12.319) 20.508,12.38 C15.2
PA0: P1.05 U1.10 | length 17.7
  Top Layer w0.25: P1.05 21.844,4.826 22.841,4.826 22.987,4.972 22.987,5.207 23.622,5.842 23.622,14.021 22.9,14.743 22.9,15.571 23.486,16.157 U1.10
PA1: P1.06 U1.11 | length 16.5
  Top Layer w0.25: P1.06 22.358,4.07 22.643,4.07 22.899,4.326 23.194,4.326 23.487,4.619 23.487,4.914 24.13,5.557 24.13,14.511 23.984,14.657 23.868,14.657 23.718,14.657 23.693,14.657 23.479,14.871 23.4,14.95 23.4,15.364 23.479,15.443 23.693,15.657 23.868,15.657 U1.11
PA2: P1.07 U1.12 | length 14.1
  Top Layer w0.25: P1.07 23.384,3.826 23.401,3.826 23.987,4.412 23.987,4.429 24.765,5.207 24.765,15.157 U1.12
PA3: P1.08 U1.13 | length 12.5
  Top Layer w0.25: P1.08 25.273,4.445 25.273,7.239 25.825,7.791 U1.13
PA4: P1.09 U1.14 | length 12.3
  Top Layer w0.25: P1.09 24.511,2.648 24.657,2.794 24.711,2.794 25.781,3.864 25.781,6.985 26.325,7.529 U1.14
PA5: P1.10 U1.15 | length 11.9
  Top Layer w0.25: P1.10 25.781,2.49 26.365,3.074 26.365,3.251 26.416,3.302 26.416,6.858 26.825,7.267 U1.15
PA6: P1.11 U1.16 | length 11.7
  Top Layer w0.25: P1.11 26.924,2.54 26.924,6.604 27.325,7.005 U1.16
PA7: P1.12 U1.17 | length 12
  Top Layer w0.25: U1.17 27.825,6.743 27.432,6.35 27.432,4.064 27.567,3.929 27.567,3.73 28.321,2.976 P1.12
PA8: P2.16 U1.29 | length 20.8
  Top Layer w0.25: U1.29 33.667,17.157 34.27,17.76 34.27,18.395 v1(34.417,18.542)
  Bottom Layer w0.25: P2.16 32.004,19.069 32.658,18.415 32.999,18.415 33.057,18.474 34.349,18.474 v1(34.417,18.542)
PA9: P2.15 U1.30 | length 26.3
  Top Layer w0.25: v1(30.711,15.859) 30.694,15.859 30.658,15.895 30.516,16.038 30.607,16.129 30.607,17.511 30.753,17.657 U1.30
  Bottom Layer w0.25: v1(30.711,15.859) 30.694,15.859 30.658,15.895 30.587,15.895 30.48,16.002 30.534,16.996 30.624,18.657 30.099,19.182 30.099,23.876 29.305,24.67 29.305,24.831 26.162,27.974 26.162,29.845 P2.15
PA10: P2.14 U1.31 | length 26.4
  Top Layer w0.25: v1(29.456,16.717) 29.414,16.675 29.354,16.675 29.227,16.548 29.049,16.548 28.956,16.548 28.956,16.764 30.349,18.157 U1.31@32.385,18.157
  Bottom Layer w0.25: v1(29.456,16.717) 29.895,16.899 30.036,17.04 30.072,17.709 30.094,18.119 29.464,18.75 29.464,18.858 ccw(c28.067,19.431) 29.464,20.004 29.464,23.749 29.391,23.822 28.805,24.408 28.805,24.624 25.527,27.902 25.527,29.972 29.346,33.791 29.346,34.172 29.464,34.29 P2.14
PA11: P2.13 R6.2 U1.32 | length 58.3
  Top Layer w0.25: v1(28.707,18.051) 28.716,18.042 v1@28.716,18.032 ; v1@28.717,18.031 28.717,18.02 28.871,18.02 29.508,18.657 U1.32
  Bottom Layer w0.25: R6.2 11.043,20.903 11.505,20.903 12.856,22.254 12.856,23.429 15.027,25.6 15.027,29.708 12.074,32.661 12.074,35.077 12.294,35.297 27.289,35.297 28.169,34.417 P2.13 28.194,34.211 27.966,33.983 27.966,33.9 27.424,33.358 27.424,32.631 24.765,29.972 24.765,27.957 28.305,24.417 28.305,24.019 28.883,23.441 28.956,23.368 28.956,19.91 cw(c28.067,19.431) 28.956,18.952 28.956,18.688 28.912,18.644 28.912,18.227 28.721,18.037 v1(28.707,18.051)
PA12: P2.12 R7.2 R8.2 U1.33 | length 43.6
  Top Layer w0.25: v1(28.067,19.431) 28.066,19.303 28.212,19.157 30.445,19.157 U1.33
  Bottom Layer w0.25: R7.2 13.633,16.21 13.258,16.585 13.258,16.795 12.758,17.295 12.758,19.616 13.356,20.214 13.356,20.264 13.666,20.574 R8.2 13.766,20.574 14.076,20.884 14.076,20.934 17.118,23.976 cw(c18.066,25.152) 16.565,24.988 16.269,25.283 16.269,25.491 19.33,28.551 23.622,28.551 ; P2.12 26.924,33.274 24.634,30.984 23.622,29.972 23.622,28.551 ; v1(28.067,19.431) 27.961,19.431 27.305,20.087 27.305,24.003 23.826,27.482 23.826,27.505 23.622,27.709 23.622,28.551
PA13: J3.02 U1.34 | length 18.8
  Top Layer w0.25: U1.34 34.389,19.657 34.63,19.898 34.63,21.803 34.798,21.971 34.918,21.851 v1(35.103,21.851)
  Bottom Layer w0.25: v1(35.103,21.851) 35.028,21.776 34.993,21.776 34.993,21.014 35.213,20.794 36.189,20.794 36.403,20.58 36.43,20.58 36.576,20.434 36.576,18.161 36.83,17.907 43.519,17.907 43.9,17.526 J3.02
PA14: J3.03 U1.37 | length 30
  Top Layer w0.25: U1.37 31.325,31.477 31.471,31.623 35.96,31.623 35.976,31.639 36.812,31.639 36.829,31.623 36.95,31.623 37.279,31.952 39.24,31.952 42.793,28.399 42.793,24.517 43.903,23.407 44.665,23.407 J3.03
PA15: P2.11 U1.38 | length 17.1
  Top Layer w0.25: P2.11 25.654,33.293 25.8,33.147 29.972,33.147 30.825,32.294 U1.38
PB0: P1.13 U1.18 | length 12.2
  Top Layer w0.25: U1.18 28.325,6.354 28.067,6.096 28.067,3.937 P1.13
PB1: P1.14 U1.19 | length 13.1
  Top Layer w0.25: U1.19 28.825,6.092 28.575,5.842 28.575,4.571 28.575,4.569 ccw(c28.825,4.571) 28.578,4.534 ccw(c29.601,4.699) 29.689,3.667 30.008,3.694 30.215,3.694 30.235,3.674 30.861,3.048 P1.14
PB2: R4.2 U1.20 | length 24
  Top Layer w0.25: U1.20 29.325,6.13 29.325,5.928 29.401,5.852 29.401,5.8 29.529,5.672 29.529,5.223 v1(29.724,5.027)
  Bottom Layer w0.25: v1(29.724,5.027) 29.836,5.14 30.54,5.14 31.343,5.943 31.343,7.46 31.496,7.614 31.496,9.887 32.014,10.404 32.014,10.424 32.245,10.655 32.344,10.655 ccw(c33.274,11.049) 34.184,11.488 ccw(c34.544,12.954) 36.049,13.081 R4.2
PB3: P2.10 U1.39 | length 17.8
  Top Layer w0.25: P2.10 24.384,32.777 24.53,32.631 29.416,32.631 30.325,31.722 U1.39
PB4: P2.09 U1.40 | length 18.7
  Top Layer w0.25: P2.09 23.114,32.277 23.26,32.131 29.17,32.131 29.825,31.476 U1.40
PB5: P2.08 U1.41 | length 19.4
  Top Layer w0.25: P2.08 21.844,31.777 21.99,31.631 28.543,31.631 29.325,30.849 U1.41
PB6: P2.07 U1.42 | length 19
  Top Layer w0.25: P2.07 21.344,33.647 21.344,31.57 22.212,30.702 27.536,30.702 28.825,29.413 U1.42@28.825,21.971
PB7: P2.06 U1.43 | length 20.5
  Top Layer w0.25: P2.06 19.304,30.895 19.997,30.202 27.329,30.202 28.325,29.206 U1.43
PB8: P2.05 U1.45 | length 18
  Top Layer w0.25: P2.05 18.034,31.458 19.79,29.702 22.082,29.702 23.173,28.611 23.699,28.611 25.433,26.877 25.433,26.345 27.325,24.453 27.325,24.316 cw(c27.075,24.313) 27.325,24.313 U1.45
PB9: P2.04 U1.46 | length 18.1
  Top Layer w0.25: P2.04 16.764,32.021 19.583,29.202 21.875,29.202 22.966,28.111 23.492,28.111 24.933,26.67 24.933,26.138 26.825,24.246 26.825,24.109 cw(c26.575,24.106) 26.825,24.106 U1.46@26.825,22.165
PB10: P1.15 U1.21 | length 12.4
  Top Layer w0.25: U1.21 29.825,8.91 30.734,8.001 30.734,4.318 32.131,2.921 P1.15
PB11: P1.16 U1.22 | length 13.2
  Top Layer w0.25: U1.22 30.325,13.288 30.325,13.025 30.325,9.117 31.234,8.208 31.234,8.136 31.242,8.128 31.242,4.524 32.456,3.31 33.255,3.31 33.401,3.164 P1.16
PB12: P2.20 U1.25 | length 31.9
  Top Layer w0.25: U1.25 32.766,15.157 34.5,15.157 35.052,14.605 37.047,14.605 38.989,16.547 38.989,29.064 38.843,29.21 37.846,29.21 36.25,27.614 36.208,27.614 35.903,27.309 v1(35.627,27.309)
  Bottom Layer w0.25: v1(35.627,27.309) 35.552,27.384 35.552,31.996 37.084,33.528 P2.20
PB13: P2.19 U1.26 | length 26.6
  Top Layer w0.25: U1.26 35.143,15.657 35.56,15.24 36.975,15.24 38.354,16.619 38.354,21.971 35.003,25.322 35.003,25.834 v1(34.808,26.029)
  Bottom Layer w0.25: v1(34.808,26.029) 34.29,26.547 34.29,27.391 34.363,27.464 34.378,27.479 ccw(c33.798,28.305) 34.773,28.042 35.052,28.321 35.052,32.203 35.814,32.965 P2.19
PB14: P2.18 U1.27 | length 26.5
  Top Layer w0.25: U1.27 35.532,16.157 35.941,15.748 36.776,15.748 37.615,16.587 37.615,17.661 35.13,20.146 35.13,20.726 35.203,20.799 35.258,20.853 ccw(c35.103,21.851) 35.253,22.85 cw(c35.291,23.097) 35.042,23.074 ccw(c34.036,22.987) 34.025,23.997 33.944,23.997 33.871,24.07 33.798,24.143 v1(33.798,28.305)
  Bottom Layer w0.25: v1(33.798,28.305) 33.798,28.349 34.544,29.095 P2.18
PB15: P2.17 U1.28 | length 23.3
  Top Layer w0.25: U1.28 33.969,16.657 34.29,16.978 34.99,16.978 35.089,17.077 35.492,17.077 v1(35.687,17.272)
  Bottom Layer w0.25: P2.17 33.274,29.21 32.639,28.575 32.639,20.066 33.121,19.584 35.287,19.584 35.433,19.438 35.433,17.928 35.492,17.87 35.492,17.467 v1(35.687,17.272)
PC13: P1.02 R5.2 U1.2 | length 54.7
  Top Layer w0.25: v1(23.517,24.004) 23.505,24.016 23.092,23.603 23.092,23.124 cw(c22.225,22.606) 23.092,22.088 23.092,20.303 23.238,20.157 24.166,20.157 U1.2
  Bottom Layer w0.25: R5.2 14.054,5.226 14.071,5.209 cw(c14.732,4.445) 15.621,3.966 P1.02 ; 15.621,4.924 15.621,6.598 15.548,6.671 15.421,6.798 14.804,7.415 14.804,9.343 15.156,9.695 15.36,9.695 15.952,10.287 15.952,10.491 16.248,10.787 16.248,13.818 16.157,13.909 16.157,13.94 15.937,14.16 14.977,14.16 14.757,13.94 14.757,13.128 14.707,13.078 14.707,12.73 14.487,12.51 13.527,12.51 13.307,12.73 13.307,13.94 13.527,14.16 13.757,14.16 13.757,14.355 14.562,15.16 16.157,15.16 16.157,16.644 17.783,18.27 17.783,22.522 18.108,22.847 18.108,23.996 17.962,24.142 17.859,24.163 cw(c18.066,25.152) 17.057,25.202 17.016,25.323 17.016,25.427 17.016,25.53 19.169,27.683 20.962,27.683 21.089,27.81 22.813,27.81 23.326,27.297 23.326,24.848 23.379,24.794 23.422,24.794 23.727,24.49 23.835,24.49 23.835,24.322 v1(23.517,24.004)
PC14: C12.2 P1.03 U1.3 Y1.2 | length 36.2
  Top Layer w0.25: v1(21.082,24.003) 21.582,23.503 21.582,20.4 21.655,20.327 22.305,19.677 22.415,19.677 22.435,19.657 U1.3
  Bottom Layer w0.25: P1.03@16.891,2.54 16.891,2.619 17.138,2.866 17.138,3.684 20.377,6.923 21.59,6.923 21.59,10.668 22.011,11.089 22.011,13.412 22.164,13.565 22.164,20.838 ; C12.2@20.508,20.139 21.061,20.692 22.017,20.692 22.164,20.838 ; Y1.2 21.844,25.928 21.844,24.765 v1(21.082,24.003) 22.007,23.078 22.007,22.787 22.164,22.631 22.164,20.838
PC15: C14.2 P1.04 U1.4 Y1.1 | length 47.3
  Top Layer w0.25: v1(19.618,23.497) 20.208,23.497 ccw(c21.082,24.003) 20.828,23.025 20.828,22.733 20.901,22.66 21.082,22.479 21.082,19.326 21.949,19.326 22.098,19.177 22.208,19.177 22.228,19.157 U1.4
  Bottom Layer w0.25: P1.04 18.161,3.163 19.993,4.995 19.993,5.832 20.584,6.423 21.421,6.423 21.78,6.064 21.807,6.09 22.225,6.09 22.225,10.596 22.511,10.882 22.511,13.205 22.664,13.358 22.664,14.43 23.235,15.002 23.235,22.848 23.089,22.994 22.654,22.994 22.507,23.14 22.507,24.422 22.733,24.648 22.733,24.887 ; v1(19.618,23.497) v1@19.177,23.497 ; C14.2 20.508,21.917 19.177,23.248 v1@19.177,23.497 ; 22.736,24.889 22.826,24.98 22.826,27.09 22.606,27.31 21.296,27.31 21.169,27.183 20.452,27.183 20.079,26.81 19.826,26.81 19.558,26.542 19.558,26.289 19.451,26.182 Y1.1 19.177,25.761 v1@19.177,23.497
RESET: P1.17 U1.7 | length 29.9
  Top Layer w0.25: U1.7 26.046,17.657 26.192,17.511 26.192,17.115 26.509,16.798 26.559,16.798 26.559,16.845 v1(26.603,16.889)
  Bottom Layer w0.25: v1(26.603,16.889) 26.559,16.845 26.608,16.795 26.551,16.738 26.551,14.417 25.928,13.794 24.513,13.794 24.442,13.723 23.637,12.917 23.511,12.791 23.511,10.762 23.662,10.61 23.225,10.173 23.225,5.373 23.199,5.347 cw(c22.225,5.08) 23.133,4.637 24.214,3.556 24.439,3.556 24.477,3.517 25.391,3.517 29.099,3.517 30.514,3.517 30.552,3.556 33.528,3.556 P1.17
VBAT: P1.01 U1.1 | length 40.3
  Top Layer w0.25: P1.01 13.554,3.21 13.481,3.283 13.481,14.964 14.154,15.637 15.564,15.637 16.135,15.066 16.135,14.441 16.727,13.849 17.563,13.849 18.155,14.441 18.155,15.819 17.117,16.857 17.117,22.767 19.364,25.014 23.936,25.014 24.527,24.422 24.527,20.657 U1.1
VCC3V3: C1.2 C2.2 C3.2 C4.2 C6.2 C10.2 C11.2 D1.A D2.A J1.1 J1.2 J3.01 P1.18 P2.01 R1.1 U1.9 U1.24 U1.36 U1.48 U2.5 | length 175.3
  Top Layer w0.25: P2.01 P2.01@13.081,34.29 ; v1(13.335,29.972) 13.462,30.099 13.462,31.263 13.081,31.644 P2.01@13.081,34.29 ; D1.A 14.906,14.59 14.906,13.433 15.052,13.287 15.564,13.287 15.784,13.067 15.784,11.291 15.952,11.123 15.952,10.287 15.36,9.695 15.331,9.695 15.331,9.62 D2.A 14.906,7.991 14.76,7.845 14.201,7.845 13.981,7.625 13.981,6.065 14.201,5.845 15.745,5.845 16.002,5.588 17.702,5.588 17.728,5.614 ccw(c17.526,6.604) 18.516,6.402 18.845,6.731 19.341,6.731 20.193,7.583 22.008,7.583 22.4,7.974 22.4,15.778 23.279,16.657 25.075,16.657 25.407,16.657 26.189,15.875 v1@27.686,15.875 ; v1(28.08,15.512) 28.075,15.512 28.067,15.729 27.921,15.875 v1@27.686,15.875 ; U1.24 31.325,13.379 31.369,13.335 34.544,13.335 v1@34.925,13.335 ; U1.36 32.6,30.353 33.37,31.123 37.158,31.123 37.486,31.452 38.323,31.452 38.652,31.123 39.086,31.123 39.729,30.48 39.859,30.48 40.005,30.334 40.005,25.548 40.064,25.49 40.064,25.087 v1(40.259,24.892) 41.783,23.368 41.783,20.4 ; J1.2@33.22,8.328 33.274,8.273 J1.1 35.823,3.293 35.823,2.531 P1.18 ; J1.2 33.165,8.491 33.165,9.813 33.399,10.047 ccw(c33.274,11.049) 34.276,10.924 35.433,12.081 35.433,13.189 ; v1(34.544,12.954) v1@34.925,13.335 ; J3.01 45.085,12.827 42.783,12.827 42.783,19.389 42.783,19.566 ccw(c43.005,20.551) 41.997,20.614 41.783,20.4 ; P2.01@13.081,34.29 19.177,28.194 21.463,28.194 25.825,23.832 U1.48 25.825,20.034 25.7,19.909 25.7,19.45 25.7,18.502 25.846,18.356 26.611,18.356 26.926,18.041 27.094,18.041 27.686,17.449 v1@27.686,15.875 ; v1@34.925,13.335 35.287,13.335 35.433,13.189 ; 35.433,13.189 36.338,13.189 41.783,18.634 41.783,20.4
  Bottom Layer w0.25: v1(13.335,29.972) 14.527,28.78 14.527,26.55 13.692,25.715 R1.1 ; C6.2@27.451,9.998 25.825,9.998 25.825,10.901 25.679,11.047 24.976,11.047 24.95,11.073 24.657,11.073 24.511,11.219 24.511,12.377 24.928,12.794 26.845,12.794 26.881,12.758 27.258,12.758 27.507,13.007 27.825,13.007 ; U2.5 27.386,6.553 27.176,6.763 27.176,7.013 26.763,7.426 26.763,7.573 26.676,7.66 26.676,9.023 27.161,9.508 27.161,9.708 27.486,10.033 C6.2 ; v1(28.08,15.512) v1(28.08,15.512) 28.075,15.511 27.686,14.859 27.686,13.146 27.759,13.073 27.825,13.007 ; v1(34.544,12.954) 34.425,13.073 32.178,13.073 32.139,13.07 31.977,13.07 ccw(c31.877,12.065) 31.877,13.075 ccw(c31.877,12.065) 31.777,13.07 28.833,13.07 28.77,13.007 27.825,13.007 ; C11.2 38.796,26.736 C1.2 ; C4.2 C3.2 38.973,23.291 38.973,25.019 C2.2 38.923,26.609 C1.2 ; v1(40.259,24.892) 40.064,25.087 40.064,25.468 39.387,26.145 39.187,26.145 38.862,26.47 C1.2

## Polygon pours and split planes (outlines as drawn)
5v on Bottom Layer "5V_L02_P001" (solid, pour order 1): 1.905,38.1 46.355,38.1 46.355,0.889 1.778,0.889 1.778,37.973 1.905,37.973
GND on Top Layer "GND_L01_P000" (solid, pour order 0): 46.482,38.1 46.482,0.889 28.829,0.889 1.905,0.758 1.905,38.1 3.429,38.1

## Text inside footprints (layer, text, board x,y; h text height)
J2: Mechanical 13 "PCB Edge" at 12.582,16.346 h0.81 r90